# Altium PCB Shredmaster.PcbDoc (part 3 of 3)
Units mm, origin at the board's own origin, x right, y up, seen from the top; angles counter-clockwise.
Board outline 59.06 x 78.97 mm, 2 copper layers (Top Layer, Bottom Layer); 83 components, 53 nets, 219 pads, 109 vias.
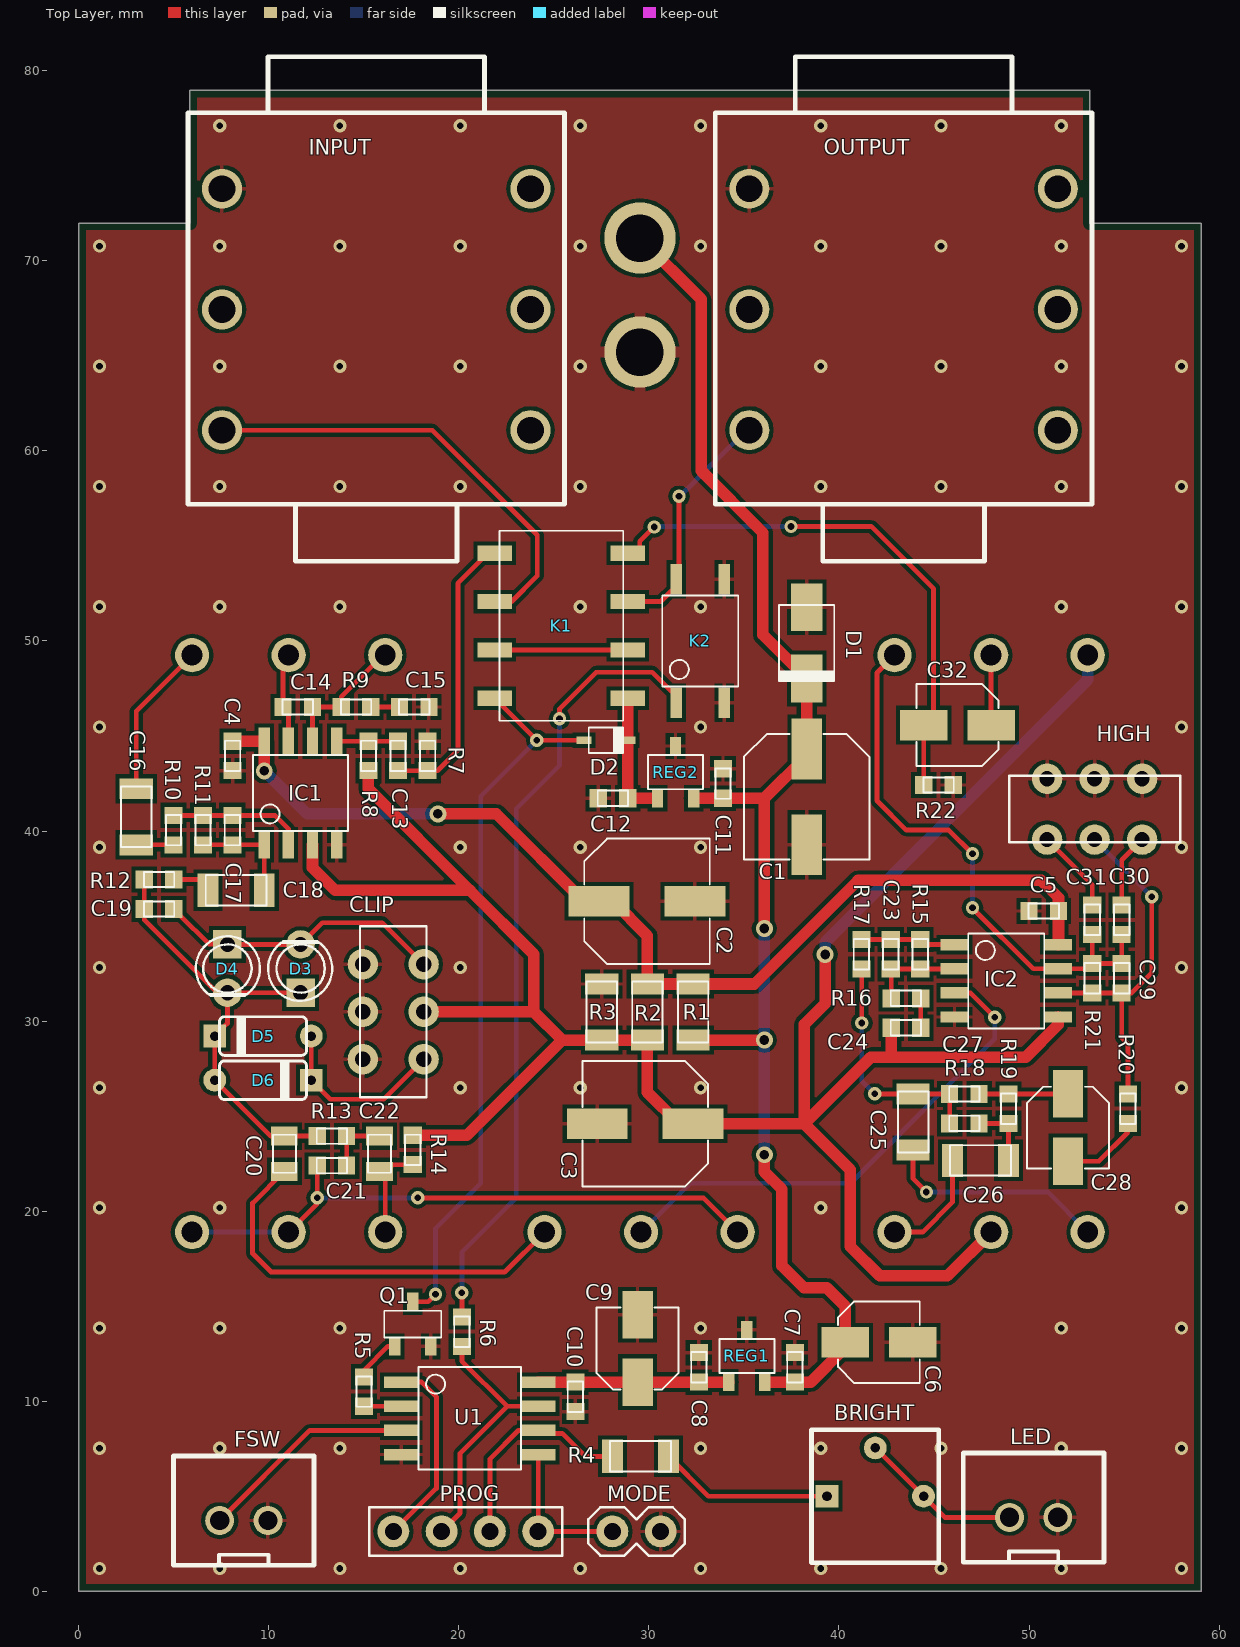
[diagram p0: Top Layer view]

## Part data (continued)
R17: library part CRCW0603100RFKEA, "RES SMD 100 OHM 1% 1/10W 0603", Case/Package=0603, Case Code (Metric)=1608, Manufacturer="Vishay Dale", Max Operating Temperature=155°C, Max Power Dissipation=100mW, Min Operating Temperature=-55°C, Package Quantity=10, Supplier Part Number 1=1469752, Temperature Coefficient=100ppm/°C, Tolerance=1%, Voltage Rating=75V, Case Code (Imperial)=0603, ComponentLink1Description=https://datasheet.ciiva.com/16941/dcrcwe3-16941318.pdf?src-supplier=Avnet+Europe, ComponentLink1URL=https://datasheet.ciiva.com/16941/dcrcwe3-16941318.pdf?src-supplier=Avnet+Europe, ComponentLink2Description=https://datasheet.ciiva.com/2465/dcrcwe3-2465543.pdf?src-supplier=Digi-Key, ComponentLink2URL=https://datasheet.ciiva.com/2465/dcrcwe3-2465543.pdf?src-supplier=Digi-Key, ComponentLink3Description=https://datasheet.ciiva.com/2465/dcrcwe3-2465544.pdf?src-supplier=Digi-Key, ComponentLink3URL=https://datasheet.ciiva.com/2465/dcrcwe3-2465544.pdf?src-supplier=Digi-Key, ComponentLink4Description=https://datasheet.ciiva.com/2465/dcrcwe3-2465545.pdf?src-supplier=Digi-Key, ComponentLink4URL=https://datasheet.ciiva.com/2465/dcrcwe3-2465545.pdf?src-supplier=Digi-Key, ComponentLink5Description=https://datasheet.ciiva.com/22673/1697337-22673066.pdf?src-supplier=Element14, ComponentLink5URL=https://datasheet.ciiva.com/22673/1697337-22673066.pdf?src-supplier=Element14, ComponentLink6Description=https://datasheet.ciiva.com/16199/dcrcwe3-16199102.pdf?src-supplier=Future+Electronics, ComponentLink6URL=https://datasheet.ciiva.com/16199/dcrcwe3-16199102.pdf?src-supplier=Future+Electronics, ComponentLink7Description=https://datasheet.ciiva.com/16721/70201119-16721486.pdf?src-supplier=Allied+Electronics, ComponentLink7URL=https://datasheet.ciiva.com/16721/70201119-16721486.pdf?src-supplier=Allied+Electronics, ComponentLink8Description=https://datasheet.ciiva.com/22666/1720486-22666207.pdf?src-supplier=Element14, ComponentLink8URL=https://datasheet.ciiva.com/22666/1720486-22666207.pdf?src-supplier=Element14, ComponentLink9Description=https://datasheet.ciiva.com/26316/fld-crcw-e3-data-en-26316566.pdf?src-supplier=Distrelec, ComponentLink9URL=https://datasheet.ciiva.com/26316/fld-crcw-e3-data-en-26316566.pdf?src-supplier=Distrelec, ComponentLink10Description=https://datasheet.ciiva.com/16787/70201119-16787964.pdf?src-supplier=Allied+Electronics, ComponentLink10URL=https://datasheet.ciiva.com/16787/70201119-16787964.pdf?src-supplier=Allied+Electronics, ComponentLink11Description=https://datasheet.ciiva.com/5550/dcrcwe3-109170-5550286.pdf?src-supplier=Mouser, ComponentLink11URL=https://datasheet.ciiva.com/5550/dcrcwe3-109170-5550286.pdf?src-supplier=Mouser, Composition="Thick Film", Contact Plating=Tin, Depth=0.85mm, Features="Automotive AEC-Q200", Height=0.02inch, Lead Free="Lead Free", Length=1.55mm, Manufacturer Part Number=CRCW0603100RFKEA, Military Standard=Not, Mount="Surface Mount", Number of Pins=2, Number of Terminations=2, Packaging="Tape and Reel", Power Rating=100mW, Pricing="10=0.0171, 100=0.0131, 500=0.0114, 1000=0.0068 (EUR)", Radiation Hardening=No, REACH SVHC=Unknown, Resistance=100R, RoHS=Yes, Stock=394970, Supplier 1=Farnell, Termination=SMD/SMT, Voltage Rating (DC)=75V, Weight=7.1E-05oz, Width=0.033inch
R18 R19: library part CRCW060333K0FKEA, "RES SMD 33K OHM 1% 1/10W 0603", Case/Package=0603, Case Code (Metric)=1608, Manufacturer=Vishay, Max Operating Temperature=155°C, Max Power Dissipation=100mW, Min Operating Temperature=-55°C, Package Quantity=10, Resistance=33kR, Supplier Part Number 1=1469801, Temperature Coefficient=100ppm/°C, Tolerance=1%, Voltage Rating=75V, Case Code (Imperial)=0603, ComponentLink1Description=https://datasheet.ciiva.com/11809/0900766b80d98afc-11809071.pdf?src-supplier=RSComponents, ComponentLink1URL=https://datasheet.ciiva.com/11809/0900766b80d98afc-11809071.pdf?src-supplier=RSComponents, ComponentLink2Description=https://datasheet.ciiva.com/5547/dcrcwe3-109170-5547006.pdf?src-supplier=Mouser, ComponentLink2URL=https://datasheet.ciiva.com/5547/dcrcwe3-109170-5547006.pdf?src-supplier=Mouser, ComponentLink3Description=https://datasheet.ciiva.com/2525/dcrcwe3-2525247.pdf?src-supplier=Digi-Key, ComponentLink3URL=https://datasheet.ciiva.com/2525/dcrcwe3-2525247.pdf?src-supplier=Digi-Key, ComponentLink4Description=https://datasheet.ciiva.com/7841/1697337-7841829.pdf?src-supplier=Element14, ComponentLink4URL=https://datasheet.ciiva.com/7841/1697337-7841829.pdf?src-supplier=Element14, ComponentLink5Description=https://datasheet.ciiva.com/16884/dcrcwe3-16884901.pdf?src-supplier=Avnet+Europe, ComponentLink5URL=https://datasheet.ciiva.com/16884/dcrcwe3-16884901.pdf?src-supplier=Avnet+Europe, ComponentLink6Description=https://datasheet.ciiva.com/16777/70201119-16777127.pdf?src-supplier=Allied+Electronics, ComponentLink6URL=https://datasheet.ciiva.com/16777/70201119-16777127.pdf?src-supplier=Allied+Electronics, ComponentLink7Description=https://datasheet.ciiva.com/17045/dcrcwe3-17045447.pdf?src-supplier=Future+Electronics, ComponentLink7URL=https://datasheet.ciiva.com/17045/dcrcwe3-17045447.pdf?src-supplier=Future+Electronics, ComponentLink8Description=https://datasheet.ciiva.com/3257/dcrcwe3-3257468.pdf?src-supplier=Avnet, ComponentLink8URL=https://datasheet.ciiva.com/3257/dcrcwe3-3257468.pdf?src-supplier=Avnet, ComponentLink9Description=https://datasheet.ciiva.com/2525/dcrcwe3-2525245.pdf?src-supplier=Digi-Key, ComponentLink9URL=https://datasheet.ciiva.com/2525/dcrcwe3-2525245.pdf?src-supplier=Digi-Key, ComponentLink10Description=https://datasheet.ciiva.com/2525/dcrcwe3-2525246.pdf?src-supplier=Digi-Key, ComponentLink10URL=https://datasheet.ciiva.com/2525/dcrcwe3-2525246.pdf?src-supplier=Digi-Key, ComponentLink11Description=https://datasheet.ciiva.com/26314/fld-crcw-e3-data-en-26314670.pdf?src-supplier=Distrelec, ComponentLink11URL=https://datasheet.ciiva.com/26314/fld-crcw-e3-data-en-26314670.pdf?src-supplier=Distrelec, Composition="Thick Film", Contact Plating=Tin, Depth=0.85mm, Features="Automotive AEC-Q200", Height=0.45mm, Lead Free="Lead Free", Length=1.55mm, Manufacturer Part Number=CRCW060333K0FKEA, Military Standard=Not, Mount="Surface Mount", Number of Terminations=2, Packaging="Tape and Reel", Power Rating=100mW, Pricing="10=0.0112, 100=0.0092, 500=0.0084, 1000=0.0075 (EUR)", Radiation Hardening=No, REACH SVHC=Unknown, RoHS=Yes, Stock=69037, Supplier 1=Farnell, Termination=SMD/SMT, Voltage Rating (DC)=75V, Weight=7.1E-05oz, Width=0.033inch
R20 R21: library part CRCW0603100KFKEA, "RES SMD 100K OHM 1% 1/10W 0603", Case/Package=0603, Case Code (Metric)=1608, Manufacturer=Vishay, Max Operating Temperature=155°C, Max Power Dissipation=100mW, Min Operating Temperature=-55°C, Package Quantity=10, Resistance=100kR, Supplier Part Number 1=1469649, Temperature Coefficient=100ppm/°C, Tolerance=1%, Voltage Rating=75V, Case Code (Imperial)=0603, ComponentLink1Description=https://datasheet.ciiva.com/11809/0900766b80d98afc-11809004.pdf?src-supplier=RSComponents, ComponentLink1URL=https://datasheet.ciiva.com/11809/0900766b80d98afc-11809004.pdf?src-supplier=RSComponents, ComponentLink2Description=https://datasheet.ciiva.com/2465/dcrcwe3-2465525.pdf?src-supplier=Digi-Key, ComponentLink2URL=https://datasheet.ciiva.com/2465/dcrcwe3-2465525.pdf?src-supplier=Digi-Key, ComponentLink3Description=https://datasheet.ciiva.com/7777/1697337-7777269.pdf?src-supplier=Element14, ComponentLink3URL=https://datasheet.ciiva.com/7777/1697337-7777269.pdf?src-supplier=Element14, ComponentLink4Description=https://datasheet.ciiva.com/15159/getdatasheetpartid-93113-15159925.pdf?src-supplier=Verical, ComponentLink4URL=https://datasheet.ciiva.com/15159/getdatasheetpartid-93113-15159925.pdf?src-supplier=Verical, ComponentLink5Description=https://datasheet.ciiva.com/46441/1720486-46441605.pdf?src-supplier=Element14, ComponentLink5URL=https://datasheet.ciiva.com/46441/1720486-46441605.pdf?src-supplier=Element14, ComponentLink6Description=https://datasheet.ciiva.com/2465/dcrcwe3-2465526.pdf?src-supplier=Digi-Key, ComponentLink6URL=https://datasheet.ciiva.com/2465/dcrcwe3-2465526.pdf?src-supplier=Digi-Key, ComponentLink7Description=https://datasheet.ciiva.com/2465/dcrcwe3-2465527.pdf?src-supplier=Digi-Key, ComponentLink7URL=https://datasheet.ciiva.com/2465/dcrcwe3-2465527.pdf?src-supplier=Digi-Key, ComponentLink8Description=https://datasheet.ciiva.com/8340/dcrcwe3-8340199.pdf?src-supplier=Avnet, ComponentLink8URL=https://datasheet.ciiva.com/8340/dcrcwe3-8340199.pdf?src-supplier=Avnet, ComponentLink9Description=https://datasheet.ciiva.com/16725/70201119-16725223.pdf?src-supplier=Allied+Electronics, ComponentLink9URL=https://datasheet.ciiva.com/16725/70201119-16725223.pdf?src-supplier=Allied+Electronics, ComponentLink10Description=https://datasheet.ciiva.com/8340/dcrcwe3-8340201.pdf?src-supplier=Avnet, ComponentLink10URL=https://datasheet.ciiva.com/8340/dcrcwe3-8340201.pdf?src-supplier=Avnet, ComponentLink11Description=https://datasheet.ciiva.com/7791/66915-7791994.pdf?src-supplier=Element14, ComponentLink11URL=https://datasheet.ciiva.com/7791/66915-7791994.pdf?src-supplier=Element14, ComponentLink12Description=https://datasheet.ciiva.com/5545/dcrcwe3-109170-5545100.pdf?src-supplier=Mouser, ComponentLink12URL=https://datasheet.ciiva.com/5545/dcrcwe3-109170-5545100.pdf?src-supplier=Mouser, ComponentLink13Description=https://datasheet.ciiva.com/26317/fld-crcw-e3-data-en-26317165.pdf?src-supplier=Distrelec, ComponentLink13URL=https://datasheet.ciiva.com/26317/fld-crcw-e3-data-en-26317165.pdf?src-supplier=Distrelec, ComponentLink14Description=https://datasheet.ciiva.com/16941/dcrcw-16941311.pdf?src-supplier=Avnet+Europe, ComponentLink14URL=https://datasheet.ciiva.com/16941/dcrcw-16941311.pdf?src-supplier=Avnet+Europe, Composition="Thick Film", Contact Plating=Tin, Depth=0.85mm, Features="Automotive AEC-Q200", Height=0.45mm, Lead Free="Lead Free", Length=1.55mm, Manufacturer Part Number=CRCW0603100KFKEA, Military Standard=Not, Number of Pins=2, Number of Terminations=2, Packaging="Tape and Reel", Power Rating=100mW, Pricing="10=0.0169, 100=0.013, 500=0.0113, 1000=0.0068 (EUR)", Radiation Hardening=No, REACH SVHC=Unknown, RoHS=Yes, Stock=573766, Supplier 1=Farnell, Termination=SMD/SMT, Voltage Rating (DC)=75V, Weight=7.1E-05oz, Width=0.033inch
REG1 REG2: library part TS78L05CXRFG, "TAIWAN SEMICONDUCTOR - TS78L05CX RFG - REG 3-TERMINAL 100MA, SMD, SOT23-3", Case/Package=SOT-23, Manufacturer="Taiwan Semiconductor", Max Input Voltage=35V, Max Operating Temperature=125°C, Min Input Voltage=0uV, Min Operating Temperature=0°C, Nominal Output Voltage=5V, Output Current=100mA, Supplier Part Number 1=1476698, ComponentLink1Description=http://www.farnell.com/datasheets/2044138.pdf?src-supplier=Farnell, ComponentLink1URL=http://www.farnell.com/datasheets/2044138.pdf?src-supplier=Farnell, ComponentLink2Description=http://www.farnell.com/datasheets/4546.pdf?src-supplier=Element14, ComponentLink2URL=http://www.farnell.com/datasheets/4546.pdf?src-supplier=Element14, ComponentLink3Description=http://www.taiwansemi.com/products/datasheet/TS78L00_I15.pdf?src-supplier=Digi-Key, ComponentLink3URL=http://www.taiwansemi.com/products/datasheet/TS78L00_I15.pdf?src-supplier=Digi-Key, Manufacturer Part Number=TS78L05CXRFG, Number of Outputs=1, Number of Pins=3, Packaging="Cut Tape", Pricing="5=0.101, 50=0.099, 100=0.097, 250=0.0949, 500=0.0929, 1000=0.0909, 5000=0.0889, 10000=0.0869 (EUR)", REACH SVHC="No SVHC", RoHS=Yes, Stock=0, Supplier 1=Farnell
TREBLE: library part POT_25kB_ALPHA_16mm, "25k Lin potentiometer round shaft", Package="PCB Mounted", Dimensions=16mm, Price=0.5
U1: library part ATTINY85-20SU, "IC, 8BIT MCU, AVR TINY, 20MHZ, 8-SOIC", Case/Package=SOIC, Frequency=20MHz, Manufacturer="Microchip / Atmel", Max Operating Temperature=85°C, Max Supply Voltage=5.5V, Min Operating Temperature=-40°C, Min Supply Voltage=2.7V, Package Quantity=95, Supplier Part Number 1=1455164, Access Time=20us, ComponentLink1Description=https://datasheet.ciiva.com/1167/1698186-1167152.pdf?src-supplier=Newark, ComponentLink1URL=https://datasheet.ciiva.com/1167/1698186-1167152.pdf?src-supplier=Newark, ComponentLink2Description=https://datasheet.ciiva.com/15122/getdatasheetpartid-131914-15122511.pdf?src-supplier=Verical, ComponentLink2URL=https://datasheet.ciiva.com/15122/getdatasheetpartid-131914-15122511.pdf?src-supplier=Verical, ComponentLink3Description=https://datasheet.ciiva.com/26207/doc2586-26207573.pdf?src-supplier=Avnet+Europe, ComponentLink3URL=https://datasheet.ciiva.com/26207/doc2586-26207573.pdf?src-supplier=Avnet+Europe, ComponentLink4Description=https://datasheet.ciiva.com/28653/1698186-28653829.pdf?src-supplier=Element14, ComponentLink4URL=https://datasheet.ciiva.com/28653/1698186-28653829.pdf?src-supplier=Element14, ComponentLink5Description=https://datasheet.ciiva.com/3203/doc2586-3203150.pdf?src-supplier=Avnet, ComponentLink5URL=https://datasheet.ciiva.com/3203/doc2586-3203150.pdf?src-supplier=Avnet, Contact Plating=Tin, Core Architecture=AVR, Data Bus Width=8b, Density=8KB, Height=1.91mm, Interface=SPI, Lead Free="Lead Free", Length=5.35mm, Manufacturer Part Number=ATTINY85-20SU, Max Frequency=20MHz, Memory Size=8KB, Memory Type=FLASH, Mount="Surface Mount", Number of ADC Channels=4, Number of I2C Channels=1, Number of I/Os=6, Number of Pins=8, Number of Programmable I/O=6, Number of PWM Channels=6, Number of SPI Channels=1, Number of Timers/Counters=2, Number of UART Channels=1, Oscillator Type=Internal, Packaging=Rail/Tube, Peripherals="Brown-out Detect/Reset", Pricing="1=0.972, 25=0.925, 100=0.894, 1000=0.862 (EUR)", Radiation Hardening=No, RAM Size=512B, REACH SVHC="No SVHC", RoHS=Yes, Stock=2172, Supplier 1=Farnell, Termination=SMD/SMT, Watchdog Timer=Yes, Width=5.4mm

## Via types
v1: diameter 0.7, hole 0.35, Top Layer to Bottom Layer, tented both sides, 87 vias
v2: diameter 0.7, hole 0.35, Top Layer to Bottom Layer, 16 vias
v3: diameter 0.889, hole 0.508, Top Layer to Bottom Layer, 6 vias

## Nets (pads, with @x,y where several pads share a name; then routed paths per layer and width w, separated by ;. In a path a pad name is that pad's centre, name@x,y a point inside that pad or via, vN(x,y) a via of type N, cw(c..) or ccw(c..) an arc to the next point about the centre after c; other vN are vias at no path point)
+5V: C8.1 C9.+ C10.1 REG1.1 U1.8 | length 10
  Top Layer w0.61: U1.8 U1.8 C10.1 C9.+ C8.1 REG1.1
+9V: C1.+ C6.+ C7.1 C11.1 D1.1 J1.GND R1.1 REG1.2 REG2.2 | length 77.9
  Top Layer w0.61: J1.GND 32.75,67.976 32.75,58.95 36,55.7 36,50.325 D1.1 C1.+ 38.3,43.95 36.075,41.725 ; R1.1 v3@36.074,29.003 ; REG2.2 C11.1 36.075,41.725 ; v3(36.075,22.969) 36.075,22.071 37,21.146 37,17.121 38.158,15.963 39.362,15.963 40.33,14.995 C6.+ 40.33,12.83 38.507,11.007 C7.1 REG1.2 ; v3(36.075,34.875) 36.075,41.725
  Bottom Layer w0.61: v3(36.075,22.969) v3(36.075,29.002) v3(36.075,34.875)
GND: C1.- C2.- C3.- C4.2 C5.2 C6.- C7.2 C8.2 C9.- C10.2 C11.2 C12.2 C15.2 CLIP.B1 CLIP.B2 CLIP.B3 D1.2 FSW.2 HIGH.B1 HIGH.B2 HIGH.B3 IC1.4 IC2.4 INPUT.S J1.PWR K2.3 K2.4 LED.2 MODE.1 OUTPUT.S Q1.2 R3.1 R7.1 R22.1 REG1.3 REG2.3 U1.4
  other v1: 1.094,1.199 7.419,1.199 13.744,1.199 20.069,1.199 26.394,1.199 32.719,1.199 39.044,1.199 45.369,1.199 51.694,1.199 58.019,1.199 1.094,7.524 7.419,7.524 13.744,7.524 32.719,7.524 39.044,7.524 45.369,7.524 51.694,7.524 58.019,7.524 1.094,13.849 7.419,13.849 13.744,13.849 32.719,13.849 51.694,13.849 58.019,13.849 1.094,20.174 7.419,20.174 39.044,20.174 58.019,20.174 1.094,26.499 20.069,26.499 26.394,26.499 32.719,26.499 58.019,26.499 1.094,32.824 20.069,32.824 58.019,32.824 1.094,39.149 20.069,39.149 26.394,39.149 32.719,39.149 58.019,39.149 1.094,45.474 32.719,45.474 58.019,45.474 1.094,51.799 7.419,51.799 13.744,51.799 26.394,51.799 32.719,51.799 51.694,51.799 58.019,51.799 1.094,58.124 7.419,58.124 13.744,58.124 20.069,58.124 26.394,58.124 39.044,58.124 45.369,58.124 51.694,58.124 58.019,58.124 1.094,64.449 7.419,64.449 13.744,64.449 20.069,64.449 26.394,64.449 39.044,64.449 45.369,64.449 51.694,64.449 58.019,64.449 1.094,70.774 7.419,70.774 13.744,70.774 20.069,70.774 26.394,70.774 32.719,70.774 39.044,70.774 45.369,70.774 51.694,70.774 58.019,70.774 7.419,77.099 13.744,77.099 20.069,77.099 26.394,77.099 32.719,77.099 39.044,77.099 45.369,77.099 51.694,77.099
INPUT: INPUT.T K1.6 | length 23.8
  Top Layer w0.254: INPUT.T 18.611,61.089 24.125,55.575 24.125,53.425 22.77,52.07 K1.6
NetBASS_1: BASS.1 C22.1 R14.2 | length 4.8
  Top Layer w0.254: BASS.1 16.129,22.057 16.519,22.447 R14.2
NetBASS_2: BASS.2 BASS.3 C21.1 TREBLE.1 | length 32.1
  Top Layer w0.254: BASS.2 12.55,20.401 v2(12.55,20.7) C21.1 ; v2(17.837,20.7) 32.871,20.7 TREBLE.1
  Bottom Layer w0.254: BASS.3 BASS.2 ; v2(12.55,20.7) v2(17.837,20.7)
NetBRIGHT_1: BRIGHT.1 R4.2 | length 9.2
  Top Layer w0.254: R4.2 33.124,5.006 BRIGHT.1
NetBRIGHT_2: BRIGHT.2 BRIGHT.3 LED.1 | length 8.6
  Top Layer w0.254: BRIGHT.2 BRIGHT.3 45.567,3.889 LED.1
NetC12_1: C12.1 D2.1 K1.1 REG2.1 | length 6.8
  Top Layer w0.61: K1.1 D2.1 C12.1 REG2.1
NetC13_1: C13.1 IC1.5 R8.1 | length 3.2
  Top Layer w0.254: IC1.5 R8.1 C13.1
NetC14_1: C14.1 GAIN.2 IC1.7 | length 4.8
  Top Layer w0.254: IC1.7 11.032,46.242 C14.1 10.752,48.538 11.049,48.835 GAIN.2
NetC14_2: C14.2 GAIN.1 IC1.6 R9.2 | length 7.1
  Top Layer w0.254: IC1.6 C14.2 R9.2 13.816,47.066 16.003,49.253 GAIN.1
NetC15_1: C15.1 R9.1 | length 1.5
  Top Layer w0.254: R9.1 16.869,46.522 C15.1
NetC16_1: C16.1 R10.1 | length 2
  Top Layer w0.254: C16.1 R10.1
NetC16_2: C16.2 GAIN.3 | length 8.2
  Top Layer w0.254: C16.2 3.025,46.309 GAIN.3
NetC17_1: C17.1 C18.2 IC1.1 R11.2 | length 5.6
  Top Layer w0.254: R11.2 C17.1 IC1.1 C18.2
NetC17_2: C17.2 IC1.2 R10.2 R11.1 | length 7.2
  Top Layer w0.254: R10.2 R11.1 C17.2 10.321,40.825 11.032,40.114 IC1.2
NetC18_1: C18.1 R12.1 | length 2.1
  Top Layer w0.254: R12.1 6.389,37.45 6.812,37.027 C18.1
NetC19_1: C19.1 C20.2 D3.ANODE D4.P$1 D5.C D6.A R12.2 R13.2 | length 23.4
  Top Layer w0.254: R12.2 C19.1 3.451,35.324 7.28,31.495 D4.P$1 ; D3.ANODE D4.P$1 ; R13.2 C20.2 10.104,23.947 D6.A D5.C 7.825,29.88 D4.P$1
NetC19_2: C19.2 CLIP.A1 D3.P$1 D4.ANODE | length 15.3
  Top Layer w0.254: C19.2 5.001,35.875 5.324,35.552 5.349,35.552 6.843,34.059 7.802,34.059 D4.ANODE D3.P$1 12.817,35.177 15.963,35.177 CLIP.A1
NetC20_1: C20.1 TREBLE.3 | length 21.7
  Top Layer w0.254: C20.1 9.15,20.422 9.15,17.773 10.123,16.8 22.411,16.8 TREBLE.3
NetC21_2: C21.2 C22.2 R13.1 | length 3.3
  Top Layer w0.254: C21.2 R13.1 C22.2
NetC23_1: C23.1 IC2.1 R15.2 R17.1 | length 5
  Top Layer w0.254: R17.1 C23.1 R15.2 44.545,34.024 IC2.1
NetC23_2: C23.2 IC2.2 R15.1 R16.1 | length 4.9
  Top Layer w0.254: R16.1 42.75,32.719 C23.2 R15.1 46.065,32.744 IC2.2
NetC24_2: C24.2 R16.2 | length 1.6
  Top Layer w0.254: C24.2 R16.2
NetC25_1: C25.1 C27.2 R17.2 R18.1 | length 12.4
  Top Layer w0.254: v2(41.2,29.9) R17.2@41.2,32.744 ; v2(41.875,26.175) 41.881,26.169 C25.1 C27.2 R18.1
  Bottom Layer w0.254: v2(41.2,29.9) 41.2,26.85 v2(41.875,26.175)
NetC25_2: C25.2 CONTOUR.1 | length 11.9
  Top Layer w0.254: C25.2 43.9,21.711 v2(44.6,21.011)
  Bottom Layer w0.254: v2(44.6,21.011) 50.975,21.011 CONTOUR.1
NetC26_1: C26.1 R18.2 R19.1 | length 3.5
  Top Layer w0.254: R18.2 R19.1 C26.1
NetC26_2: C26.2 CONTOUR.3 | length 5.9
  Top Layer w0.254: CONTOUR.3 44.4,18.9 45.967,20.467 C26.2
NetC27_1: C27.1 C28.+ R19.2 | length 4.7
  Top Layer w0.254: C27.1 R19.2 C28.+
NetC28_-: C28.- R20.1 | length 4.3
  Top Layer w0.254: C28.- 53.675,22.625 55.19,24.14 55.19,24.608 R20.1
NetC29_1: C29.1 C30.1 C31.1 IC2.7 R21.2 VOL.3 | length 29.4
  Top Layer w0.254: VOL.3 42,48.327 42,41.597 43.547,40.05 45.775,40.05 v2(47.025,38.8) ; v2@47,35.971 50.217,32.754 IC2.7 53.045,32.754 R21.2 ; C31.1 R21.2 ; C30.1 C29.1 R21.2
  Bottom Layer w0.254: v2@47.025,35.996 v2(47.025,38.8)
  other v2: 47.025,35.971
NetC29_2: C29.2 HIGH.A2 IC2.6 R20.2 R21.1 | length 19.1
  Top Layer w0.254: IC2.6 R21.1 C29.2 C29.2@54.877,31.484 ; R20.2 55.2,28.81 54.877,29.132 C29.2@54.877,31.484 ; v2(56.456,36.544) 56.456,32.541 55.399,31.484 C29.2@54.877,31.484
  Bottom Layer w0.254: HIGH.A2 v2(56.456,36.544)
NetC30_2: C30.2 HIGH.A1 | length 3.9
  Top Layer w0.254: C30.2@54.9,36.1 C30.2 54.875,38.475 HIGH.A1
NetC31_2: C31.2 HIGH.A3 | length 4.4
  Top Layer w0.254: HIGH.A3 53.325,37.175 C31.2
NetC32_+: C32.+ VOL.2 | length 3.7
  Top Layer w0.254: C32.+ VOL.2
NetCLIP_A3: CLIP.A3 D5.A D6.C | length 9.5
  Top Layer w0.254: D5.A D6.C 13.239,25.892 16.051,25.892 CLIP.A3
NetD2_2: D2.2 K1.8 Q1.3 | length 38.3
  Top Layer w0.254: Q1.3 18.385,15.235 v2(18.775,15.625) ; K1.8 v2(24.101,44.775) D2.2
  Bottom Layer w0.254: v2(18.775,15.625) 18.775,19.1 21.15,21.475 21.15,41.824 v2(24.101,44.775)
NetIC2_3: IC2.3 TREBLE.2 | length 26.6
  Top Layer w0.254: IC2.3 46.916,31.484 v2(48.2,30.2)
  Bottom Layer w0.254: TREBLE.2 32.164,21.473 40.607,21.473 48.2,29.066 v2(48.2,30.2)
NetK1_2: K1.2 K1.7 | length 7
  Top Layer w0.254: K1.7 K1.2
NetK2_1: K2.1 R6.2 | length 41.9
  Top Layer w0.254: R6.2 v2(20.16,15.715) ; v2(25.3,45.9) 25.3,46.425 27.225,48.35 30.175,48.35 31.43,47.095 K2.1
  Bottom Layer w0.254: v2(20.16,15.715) 20.16,17.835 23.025,20.7 23.025,41.175 25.3,43.45 v2(25.3,45.9)
NetQ1_1: Q1.1 R5.2 | length 2.5
  Top Layer w0.254: R5.2 15.016,11.633 16.268,12.885 Q1.1
OUTPUT: K1.3 K2.6 OUTPUT.T | length 12.8
  Top Layer w0.254: K1.3 30.609,52.07 31.43,52.891 K2.6 31.586,53.406 v2(31.586,57.611)
  Bottom Layer w0.254: v2(31.586,57.611) 31.636,57.611 35.114,61.089 OUTPUT.T
PB0: MODE.2 PROG.4 U1.5 | length 8
  Top Layer w0.254: U1.5 PROG.4 MODE.2
PB1: PROG.3 R4.1 U1.6 | length 11.4
  Top Layer w0.254: PROG.3 21.635,6.96 23.14,8.465 U1.6 24.335,8.305 25.445,8.305 26.65,7.1 R4.1
PB2: PROG.2 R6.1 U1.7 | length 13.8
  Top Layer w0.254: PROG.2 20.066,4.121 20.066,7.261 22.54,9.735 ; R6.1 20.16,12.115 22.54,9.735 ; U1.7 22.54,9.735
PB3: R5.1 U1.2 | length 2
  Top Layer w0.254: R5.1 U1.2
PB4: FSW.1 U1.3 | length 11.5
  Top Layer w0.254: FSW.1 12.157,8.465 U1.3
PB5: PROG.1 U1.1 | length 10.2
  Top Layer w0.254: PROG.1 18.823,5.418 18.823,10.235 18.053,11.005 U1.1
RETURN: C32.- K1.4 R22.2 | length 28.8
  Top Layer w0.254: K1.4 29.245,54.61 29.518,54.883 29.518,55.242 v2(30.275,55.999) ; v2(37.475,56.025) 41.7,56.025 44.978,52.747 44.978,46.091 C32.- R22.2
  Bottom Layer w0.254: v2(30.275,55.999) 30.301,56.025 v2(37.475,56.025)
SEND: C13.2 K1.5 R7.2 | length 15
  Top Layer w0.254: C13.2 R7.2 18.879,43.175 19.95,44.246 19.95,53.033 21.527,54.61 K1.5
Vb: C3.+ C24.1 CLIP.A2 CONTOUR.2 IC1.3 IC2.5 R2.2 R3.2 R8.2 R14.1 VOL.1 | length 125
  Top Layer w0.61: IC1.3 12.302,38.073 13.5,36.875 20.588,36.875 ; R8.2 15.245,42.218 20.588,36.875 ; R14.1 20.427,23.997 25.433,29.003 ; CLIP.A2 23.946,30.49 ; v3(39.275,33.506) 39.275,30.925 38.175,29.825 38.175,24.6 ; C24.1 42.75,28.1 ; CONTOUR.2 45.706,16.6 42.141,16.6 40.6,18.141 40.6,22.175 38.175,24.6 ; IC2.5 51.523,30.211 51.523,29.801 49.822,28.1 42.75,28.1 ; 20.588,36.875 23.946,33.517 23.946,30.49 ; 23.946,30.49 25.433,29.003 ; 25.433,29.003 R3.2 R2.2 29.922,26.258 31.58,24.6 C3.+ 38.175,24.6 ; 38.175,24.6 41.675,28.1 42.75,28.1
  Bottom Layer w0.61: v3@39.275,33.575 39.275,34.15 53.086,47.961 VOL.1
Vr: C2.+ C4.1 C5.1 IC1.8 IC2.8 R1.2 R2.1 | length 56.3
  Top Layer w0.61: C4.1 IC1.8 v3(9.762,43.163) ; v3(18.9,40.9) 21.979,40.9 26.579,36.3 C2.+ 28.12,36.3 29.922,34.499 R2.1 R1.2 35.553,31.953 41,37.4 50.65,37.4 51.55,36.5 C5.1 51.55,34.028 51.545,34.024 IC2.8
  Bottom Layer w0.61: v3(9.762,43.163) 12.025,40.9 v3(18.9,40.9)
pads on no net: INPUT.R INPUT.RN INPUT.SN INPUT.TN OUTPUT.R OUTPUT.RN OUTPUT.SN OUTPUT.TN

## Polygon pours and split planes (outlines as drawn)
GND on Top Layer "GND_L01_P010" (solid, pour order 10): 0,0 59.055,0 59.055,71.986 53.204,71.986 53.204,78.971 5.85,78.971 5.85,71.986 0,71.986
GND on Bottom Layer "GND_L02_P008" (solid, pour order 8): 0,0 59.055,0 59.055,71.859 59.182,71.986 53.204,71.986 53.204,78.971 5.85,78.971 5.85,71.986 0,71.986

## Keep-outs
Keep-Out Layer:
  lines w0.025: 14.741,0 0,0 0,71.986 5.85,71.986 5.85,78.971 53.205,78.971 53.205,71.986 59.055,71.986 59.055,0 44.268,0 ; 14.766,0 44.294,0